# Altium PCB Group9Racer.PcbDoc (part 1 of 2)
Units mm, origin at the board's own origin, x right, y up, seen from the top; angles counter-clockwise.
Board outline 64 x 85 mm, 4 copper layers (Top Side, Ground Plane, Power Plane, Bottom Side), stack 0.844 mm thick; 107 components, 71 nets, 321 pads, 104 vias.
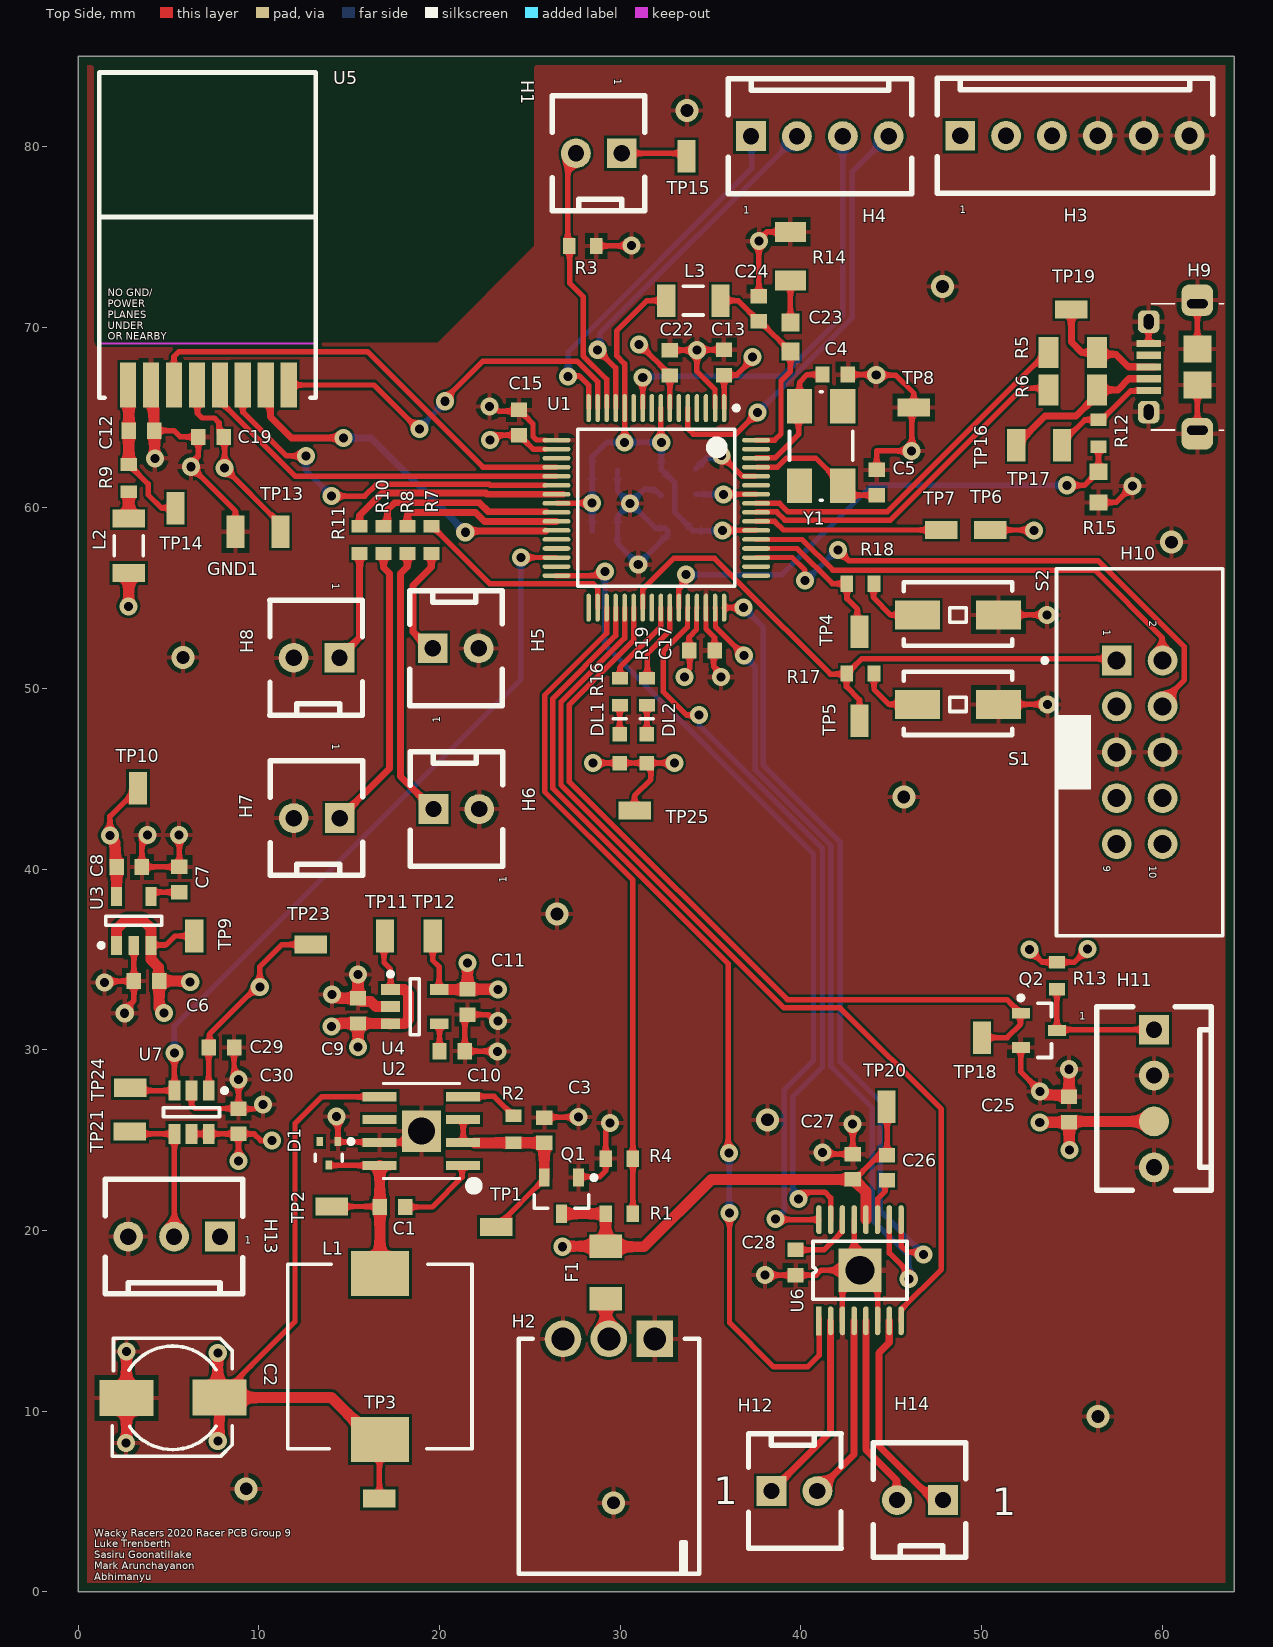
[diagram p0: Top Side view]
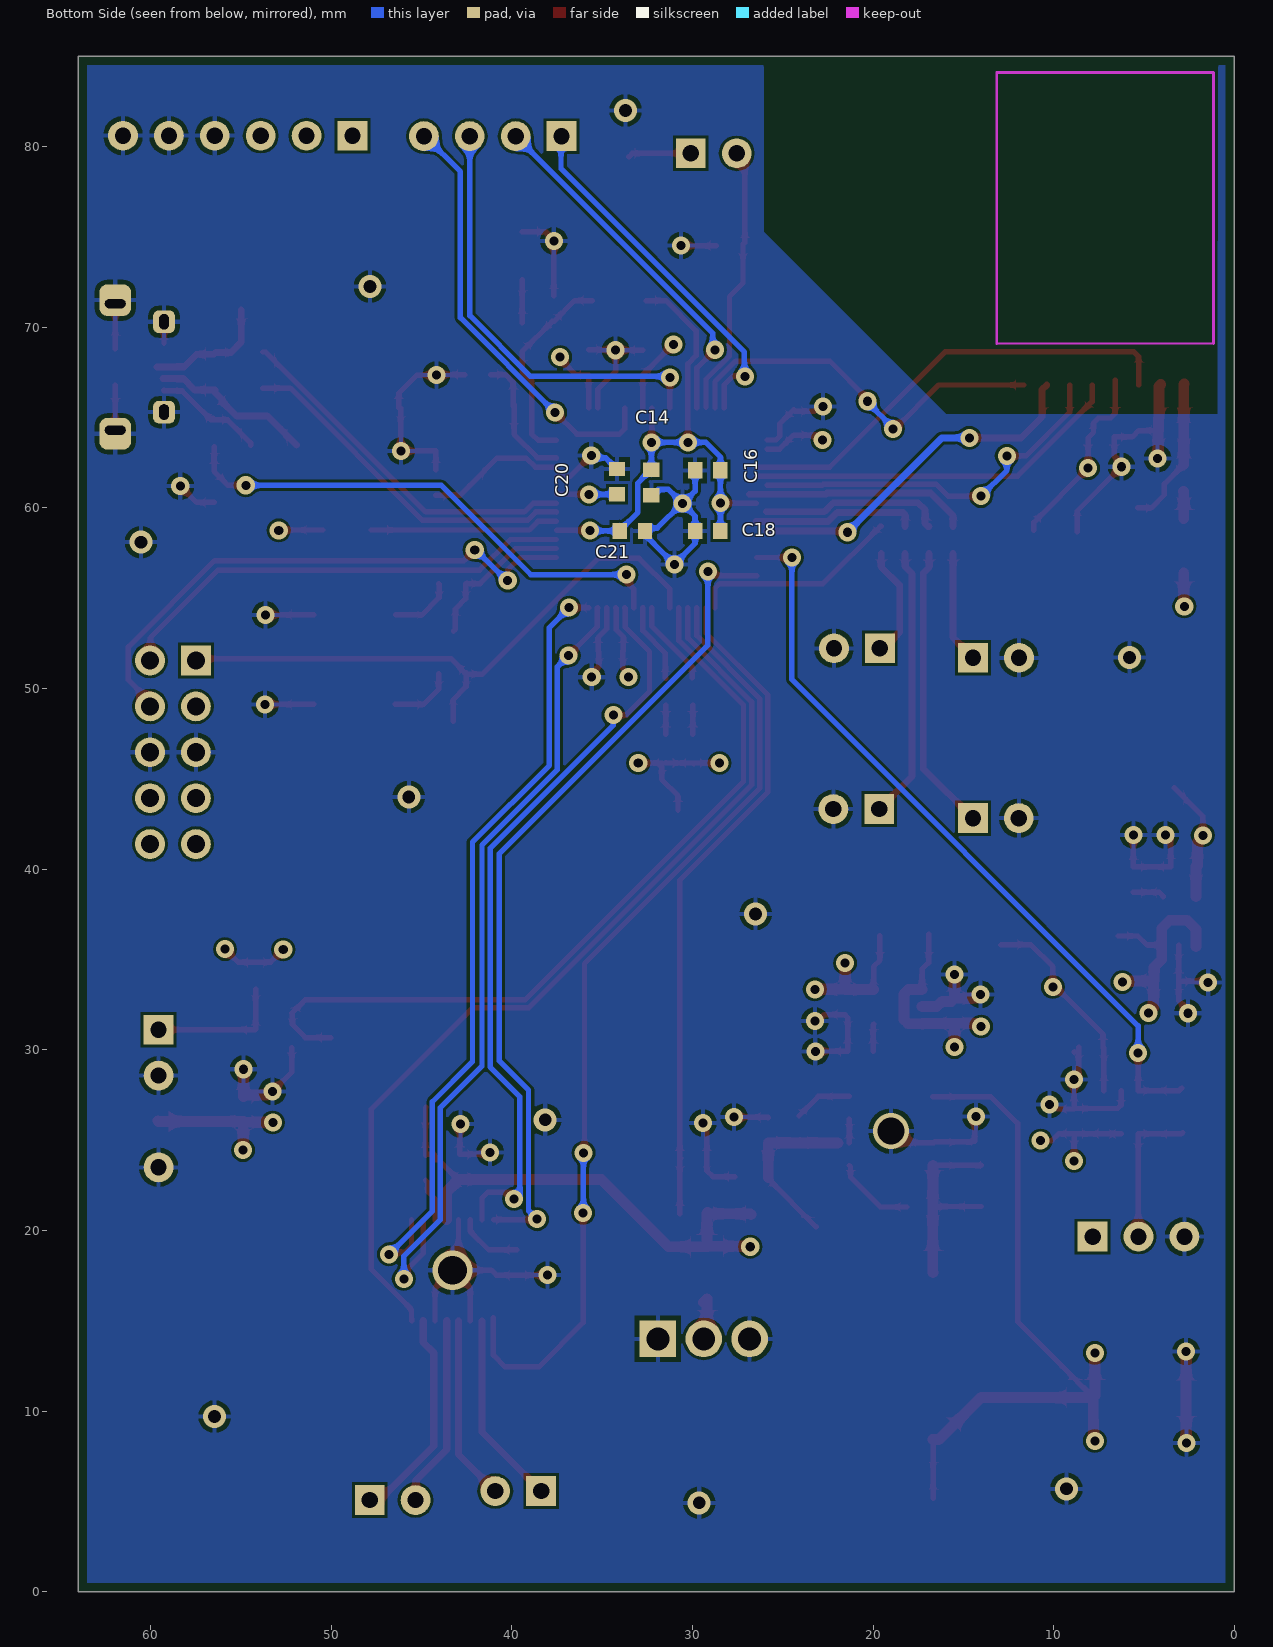
[diagram p1: Bottom Side view, seen from below]
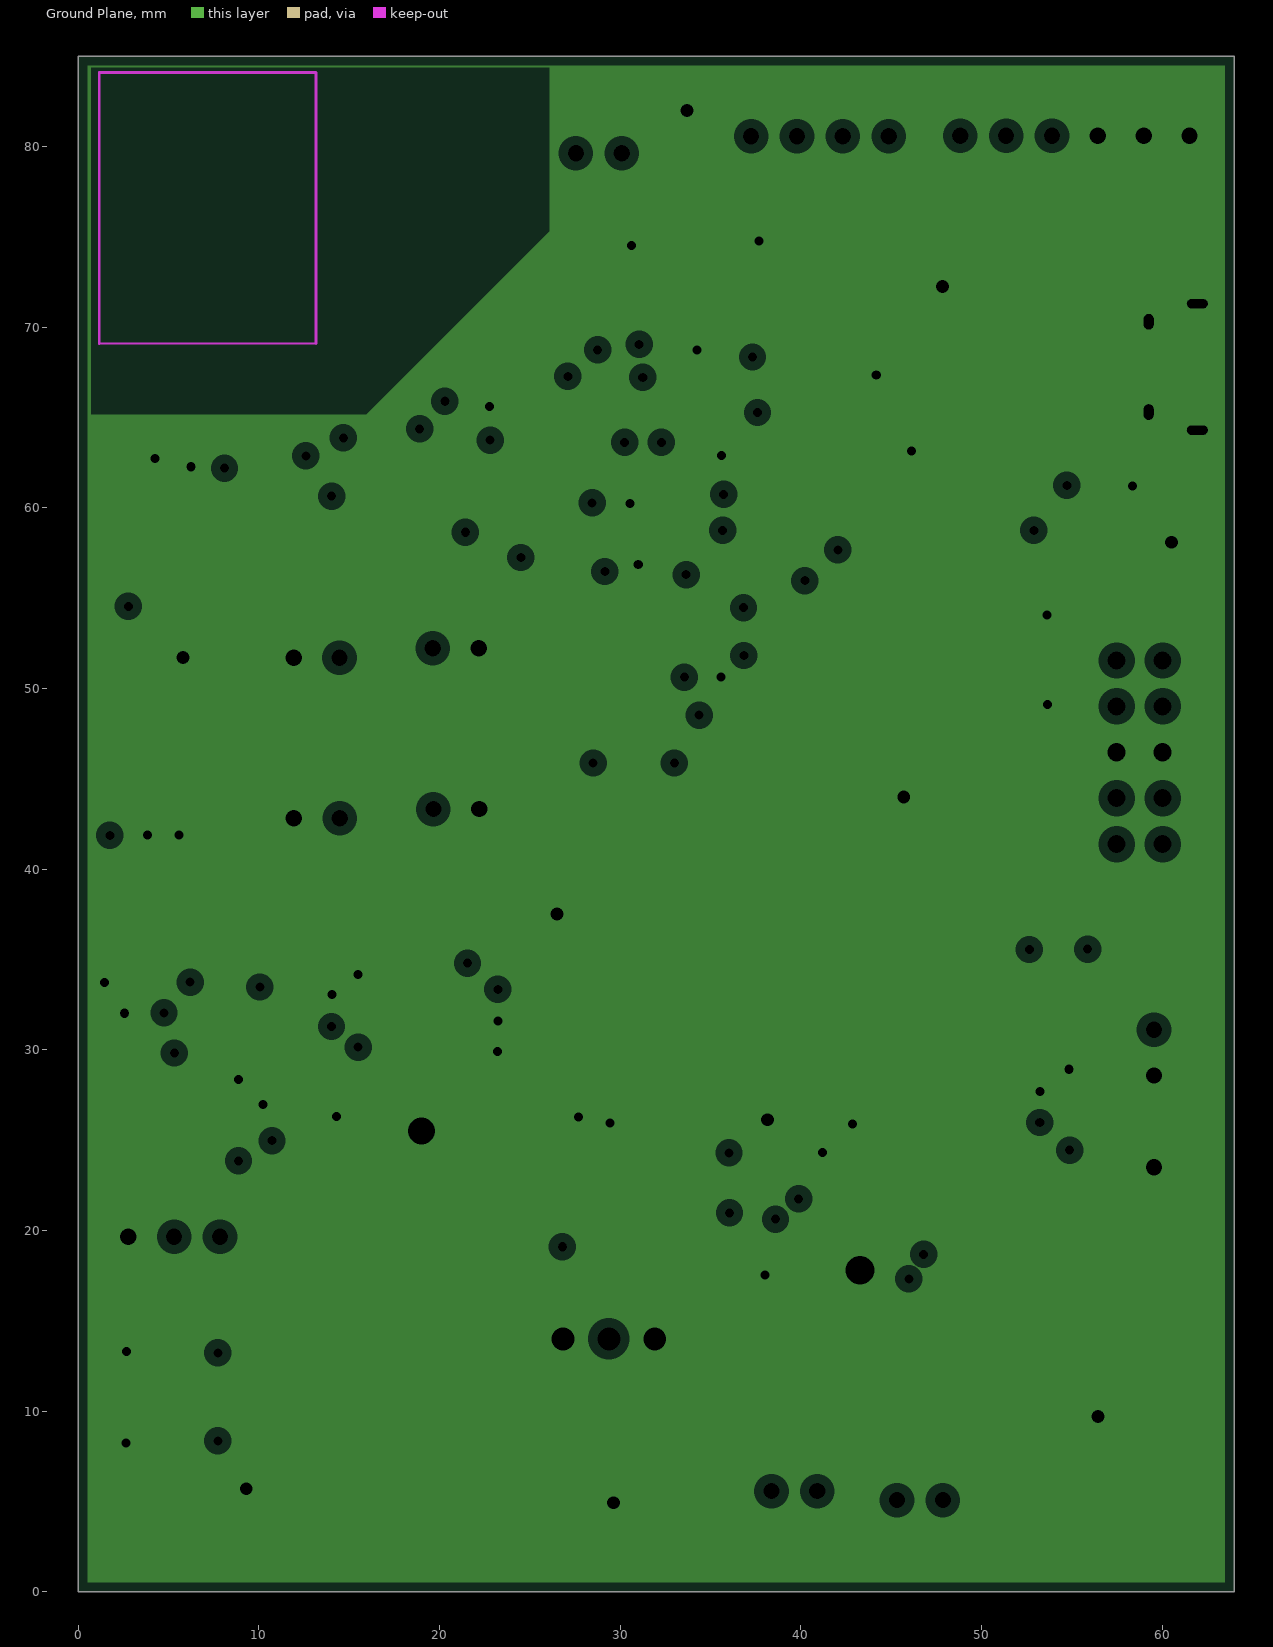
[diagram p2: Ground Plane, clearances drawn from the general rule]
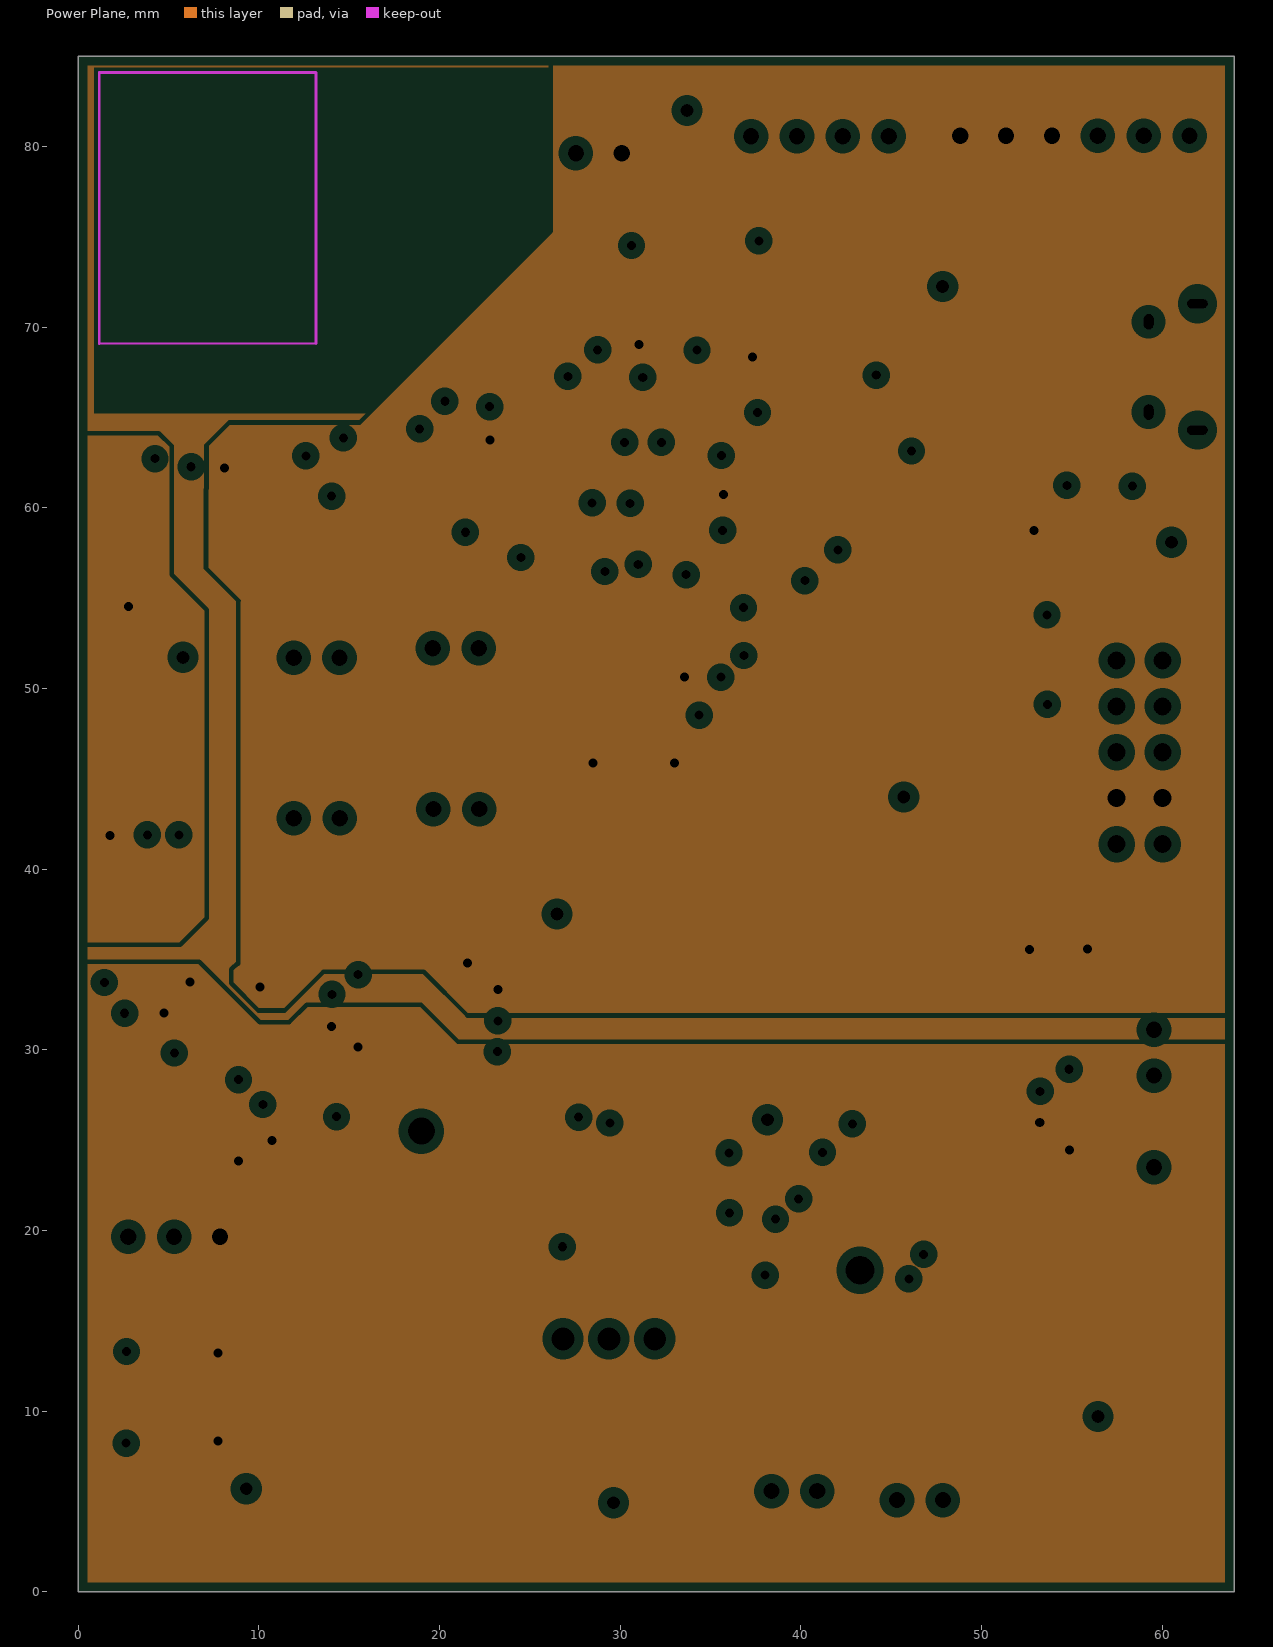
[diagram p3: Power Plane, clearances drawn from the general rule]

## Layer stack, top to bottom
Top Solder: solder mask 0.0102, Solder Resist, Dk 3.5
Top Side: signal copper 0.0356
Dielectric 1: core 0.32, FR-4, Dk 4.8
Ground Plane: plane copper 0.036, net GND
Dielectric 3: prepreg 0.127, Dk 4.2
Power Plane: plane copper 0.036, net (Multiple Nets)
Dielectric 4: core 0.254, Dk 4.2
Bottom Side: signal copper 0.0356
Bottom Solder: solder mask 0.0102, Solder Resist, Dk 3.5

## Board outline
0,85 64,85 64,0 0,0 0,85

## Design rules (kind name [scope] priority, off if disabled: settings)
BoardOutlineClearance [All] p1: gap=0.5 ignorepadtopadclearanceinfootprint=FALSE
Clearance Min_Clearance_Circuit_Labs [All] p1: gap=0.15 ignorepadtopadclearanceinfootprint=FALSE except(0: Arc-Hole Track-Hole SMDPad-Hole THPad-Hole Via-Hole Fill-Hole Poly-Hole Region-Hole Text-Hole)
DiffPairsRouting [All] p1: maxlimit=0.254 minlimit=0.254 mostfreqgap=0.254 toplayer_minwidth=0.381 toplayer_maxwidth=0.381 toplayer_prefwidth=0.381 bottomlayer_minwidth=0.381 bottomlayer_maxwidth=0.381 bottomlayer_prefwidth=0.381 maxuncoupledlength=12.7
FanoutControl Fanout_BGA [IsBGA] p1 off: bgadir=Out bgaviamode=Centered fanoutstyle=Auto fanoutdirection=Alternating viagrid=0.025 // Fanout_BGA (Default Rule)
HoleSize [All] p1: absolutevalues=TRUE maxlimit=10 minlimit=0.3 maxpercent=80.000 minpercent=20.000
MinimumAnnularRing [All] p1: minimumring=0.1
MinimumSolderMaskSliver [All] p1: minsoldermaskwidth=0.1
NetAntennae [All] p1: netantennaetolerance=1
PasteMaskExpansion [All] p1 off: expansion=0.2
PlaneClearance [All] p1: clearance=0.508
PlaneConnect [All] p1: planeconnectstyle=Relief reliefexpansion=0.508 reliefentries=4 reliefconductorwidth=0.254 reliefairgap=0.254
PolygonConnect [All] p1: connectstyle=Relief reliefconductorwidth=0.254 reliefentries=4 polygonreliefangle="90 Angle" airgapwidth=0.254
RoutingVias [All] p1: holewidth=0.5 width=1 viastyle="Through Hole" minholewidth=0.3 minwidth=0.6 maxholewidth=1 maxwidth=2
SMDNeckDown [All] p1 off: percent=50.000
SMDToCorner [All] p1: distance=98425
SMDToPlane [All] p1: distance=1968504
SilkToSolderMaskClearance SilkscreenOverComponentPads [IsPad] p1: minsilkscreentomaskgap=0.254 clearancetoexposedcopper=TRUE
SolderMaskExpansion [All] p1: expansion=0.102
ViasUnderSMD [All] p1: allowed=FALSE
Width [All] p1: maxlimit=2 minlimit=0.15 preferedwidth=0.3
21 further rules are at their usual default settings.

## Classes and differential pairs
differential pair D: +D_P -D_N

## Components (designator, comment, footprint, x,y, rotation, side; value= is the part's Value field where it differs from the comment)
C1 "100nF" CAPC1608L 17.4,21.3 r0 top
C2 "100uF/16V" NICH-1 5.232,10.744 r0 top
C3 "10uF" CAPC1608L 25.8,25.55 r270 top
C4 "27pF" CAPC1608L 41.9,67.375 r0 top
C5 "27pF" CAPC1608L 44.2,61.4 r90 top
C6 "1uF" CAPC1608L 3.785,33.807 r0 top
C7 "10nF" CAPC1608L 5.6,39.425 r270 top
C8 "1uF" CAPC1608L 2.825,40.125 r180 top
C9 "1uF" CAPC1608L 15.494,32.156 r270 top
C10 "10nF" CAPC1608L 20.7,29.925 r180 top
C11 "1uF" CAPC1608L 21.55,32.65 r90 top
C12 "10uF" CAPC1608L 3.5,64.275 r180 top
C13 "100nF" CAPC1608L 35.75,68.05 r90 top
C14 "100nF" CAPC1608L 32.275,61.4 r90 bottom
C15 "100nF" CAPC1608L 24.4,64.725 r90 top
C16 "100nF" CAPC1608L 29.15,62.075 r180 bottom
C17 "100nF" CAPC1608L 34.525,52.1 r0 top
C18 "100nF" CAPC1608L 29.15,58.725 r180 bottom
C19 "10nF" CAPC1608L 7.35,63.925 r0 top
C20 "100nF" CAPC1608L 34.175,61.45 r90 bottom
C21 "100nF" CAPC1608L 33.325,58.725 r0 bottom
C22 "100nF" CAPC1608L 32.75,68.025 r90 top
C23 "4.7uF" CAPC1608N 39.425,69.45 r270 top
C24 "100nF" CAPC1608L 37.675,71.025 r90 top
C25 "100nF" CAPC1608L 54.85,26.7 r270 top
C26 "10nF" CAPC1608L 44.775,23.475 r270 top
C27 "10uF" CAPC1608L 42.875,23.525 r270 top
C28 "2.2uF" CAPC1608L 39.7,18.225 r270 top
C29 "100nF" CAPC1608L 7.925,30.125 r0 top
C30 "100nF" CAPC1608L 8.875,26.05 r90 top
D1 "BAS16TT1G" SOT416 13.875,24.275 r180 top
DL1 "Yellow" WL-SMCW0603 29.975,47.475 r270 top
DL2 "Bright Green" WL-SMCW0603 31.475,47.475 r270 top
F1 "5A" RESC3216N 29.2,17.675 r90 top
GND1 "GND" TP_0603 8.7,58.675 r90 top
H1 "2 Pin Molex KK HDR" MOLEX_KK_2_HDR 30.09,79.625 r180 top
H2 "Battery_HEADER_3pin" BATT_HEADER_3POS 29.375,14 r180 top
H3 "6 Pin Molex KK Hdr" MOLEX_KK_6_HDR 48.82,80.6 r0 top
H4 "4 Pin Molex KK Hdr" MOLEX_KK_4_HDR#1 37.245,80.575 r0 top
H5 "2 Pin Molex KK HDR" MOLEX_KK_2_HDR 19.625,52.225 r0 top
H6 "2 Pin Molex KK HDR" MOLEX_KK_2_HDR 19.66,43.325 r0 top
H7 "2 Pin Molex KK HDR" MOLEX_KK_2_HDR 14.475,42.825 r180 top
H8 "2 Pin Molex KK HDR" MOLEX_KK_2_HDR 14.465,51.7 r180 top
H9 "JS_USB_MICRO_B" FCI_USB_10118194-0001LF 63.4,67.8 r90 top
H10 "Header 5X2 Vert" IDC2.54-V10D 58.755,46.47 r270 top
H11 "4 Pin Molex KK Hdr" MOLEX_KK_4_HDR#2 59.55,31.115 r270 top
H12 "2 Pin Molex KK HDR" MOLEX_KK_2_HDR 38.375,5.575 r0 top
H13 "3 Pin Molex KK Hdr" MOLEX_KK_3_HDR 7.849,19.66 r180 top
H14 "2 Pin Molex KK HDR" MOLEX_KK_2_HDR 47.865,5.075 r180 top
L1 "IND 5.2UH 6A" INDUCTOR5u2 16.7,13.025 r270 top
L2 "1A max, Idc 0.3R," INDC3216L 2.8,57.9 r270 top
L3 "1A max, Idc 0.3R," INDC3216L 34.05,71.475 r180 top
Q1 "SSM3J328R,LF" SOT23_L 26.75,21.925 r270 top
Q2 "SSM3J328R,LF" SOT23_L 53.175,31.075 r0 top
R1 "220K" RESC1608L 29.95,20.925 r180 top
R2 "100K" RESC1608L 24.1,25.6 r270 top
R3 "10K" RESC1608L 27.925,74.5 r180 top
R4 "220K" RESC1608L 29.95,23.975 r0 top
R5 "27R" RESC3216L 55.05,68.6 r180 top
R6 "27R" RESC3216L 55.05,66.525 r180 top
R7 "680R" RESC1608L 19.55,58.225 r270 top
R8 "680R" RESC1608L 18.225,58.225 r270 top
R9 "10R" RESC1608L 2.8,61.65 r270 top
R10 "680R" RESC1608L 16.9,58.225 r270 top
R11 "680R" RESC1608L 15.575,58.225 r270 top
R12 "27K" RESC1608L 56.475,64.125 r90 top
R13 "1K" RESC1608L 54.175,34.1 r90 top
R14 "1R" RESC3216L 39.425,73.925 r270 top
R15 "47K" RESC1608N 56.475,61.15 r90 top
R16 "680R" RESC1608L 29.985,49.822 r90 top
R17 "680R" RESC1608L 43.3,50.825 r0 top
R18 "680R" RESC1608L 43.3,55.8 r0 top
R19 "680R" RESC1608L 31.485,49.822 r90 top
S1 "EVQPNF05M" EVQPNF05M 48.7,49.125 r0 top
S2 "EVQPNF05M" EVQPNF05M 48.7,54.075 r0 top
TP1 "VBAT" TP_0603 23.15,20.2 r180 top
TP2 "5V" TP_0603 14.025,21.325 r180 top
TP3 "5V" TP_0603 16.675,5.175 r0 top
TP4 "TP_0603" TP_0603 43.25,53.15 r90 top
TP5 "nRST" TP_0603 43.25,48.225 r270 top
TP6 "3V3" TP_0603 50.475,58.775 r0 top
TP7 "Erase" TP_0603 47.775,58.775 r0 top
TP8 "GND" TP_0603 46.25,65.55 r0 top
TP9 "5V" TP_0603 6.425,36.3 r270 top
TP10 "3V3RF" TP_0603 3.3,44.475 r90 top
TP11 "5V" TP_0603 16.975,36.3 r90 top
TP12 "3V3" TP_0603 19.625,36.3 r270 top
TP13 "3V3" TP_0603 11.2,58.675 r90 top
TP14 "3V3RF" TP_0603 5.375,59.975 r270 top
TP15 "3V3" TP_0603 33.675,79.45 r90 top
TP16 "D_N" TP_0603 51.925,63.475 r90 top
TP17 "VBUS" TP_0603 54.45,63.475 r270 top
TP18 "SP_EN" TP_0603 50.025,30.675 r90 top
TP19 "D_P" TP_0603 54.975,70.975 r180 top
TP20 "VBAT" TP_0603 44.75,26.85 r270 top
TP21 "LEDB" TP_0603 2.845,25.476 r180 top
TP23 "3V3" TP_0603 12.875,35.825 r180 top
TP24 "LEDA" TP_0603 2.875,27.9 r180 top
TP25 "3V3" TP_0603 30.8,43.25 r0 top
U1 "ATSAM4S8BA-ANR" LQFP64_L 32,60 r270 top locked
U2 "ADP2302ARDZ-5.0 BUCK" RD_8_1 19,25.5 r180 top locked value=Value
U3 "CAT6219-330TDGT3" SOT95P280X145-5N 3.073,37.135 r90 top
U4 "CAT6219-330TDGT3" SOT95P280X145-5N 18.635,32.389 r0 top
U5 "nRF24 SMD" NRF24 1.157,66.1 r0 top
U6 "DRV8833" HTSOP16 41,15 r90 top locked
U7 "SN74LVC1T45" SOT23-6_N 6.274,26.543 r270 top
Y1 "12MHz" 6.0X3.5-4 41.125,63.425 r90 top

## Footprints (in the part's own frame and the unit in brackets; to place one, negate y for a bottom-side part, rotate by r counter-clockwise, add the part's x,y. Pads: shape width x height; smd on the part's side, far side on the other; paste and mask are expansions set on the pad)
6.0X3.5-4 [mm] "4 SMD 6.0X3.5 mm No Lead Crystal"
  rect 1.9x1.4 smd: 1(-2.2,-1.2) 2(2.2,-1.2) 3(2.2,1.2) 4(-2.2,1.2)
  silkscreen extent -3,-1.75 3,1.75, body extent -3,-1.75 3,1.75, height 1.2
BATT_HEADER_3POS [mil]
  rect 80x80 hole 50: 1(-100,0)
  round 80 hole 50: 2(0,0) 3(100,0)
  silkscreen extent -197,0 197,512
CAPC1608L [mm] "Chip Capacitor, Body 1.6x0.8mm, IPC High Density"
  rect 0.8x0.9 smd: 1(-0.7,0) 2(0.7,0)
  body extent -0.87,-0.48 0.87,0.48, height 0.85
CAPC1608N [mm] "Chip Capacitor, Body 1.6x0.8mm, IPC Medium Density"
  rect 1x1 smd: 1(-0.8,0) 2(0.8,0)
  body extent -0.87,-0.48 0.87,0.48, height 0.85
EVQPNF05M [mm] "Panansonic light touch SMD push button switch"
  rect 2.5x1.6 smd: 1(-2.25,0) 2(2.25,0)
  silkscreen extent -3,-1.7 3,1.8, body extent -3,-1.7 3,1.8, height 5
FCI_USB_10118194-0001LF [mm] "Micro USB B Type Receptacle"
  rect 0.4x1.35 smd mask+0.07: 1(-1.3,4.15) 2(-0.65,4.15) 3(0,4.15) 4(0.65,4.15) 5(1.3,4.15)
  rrect50% 1.75x1.75 hole 0.5 slot 1.15 at 90 deg copper offset -0.2,0 paste+0 mask+0.1: 6(-3.5,1.45)
  rrect50% 1.25x1.2 hole 0.55 slot 0.85 at 0 deg: 6(-2.5,4.15) 6(2.5,4.15)
  rect 1.5x1.55 smd: 6(-1,1.45) 6(1,1.45)
  rrect50% 1.75x1.75 hole 0.5 slot 1.15 at 90 deg copper offset 0.2,0 paste+0 mask+0.1: 6(3.5,1.45)
  silkscreen extent -3.5,0 3.5,4
HTSOP16 [mm]
  rect 1.6x0.3 smd: 1(0,0)
  oval 1.6x0.3 smd: 2(0,-0.65) 3(0,-1.3) 4(0,-1.95) 5(0,-2.6) 6(0,-3.25) 7(0,-3.9) 8(0,-4.55) 9(5.6,-4.55) 10(5.6,-3.9) 11(5.6,-3.25) 12(5.6,-2.6) 13(5.6,-1.95) 14(5.6,-1.3) 15(5.6,-0.65) 16(5.6,0)
  rect 2.4x2.4 smd paste-0.5: 17(2.8,-2.275)
  silkscreen extent 1.2,-4.88 4.4,0.33
IDC2.54-V10D [mm] "Connector; IDC, Low Profile Male Header, Thru-Hole; 10 Position; Vertical; Pitch 2.54 mm; Body 20.32 x 9.2 x 9.45 mm (LxWxH)"
  rect 1.65x1.65 hole 1: 1(-5.08,-1.27)
  round 1.65 hole 1: 2(-5.08,1.27) 3(-2.54,-1.27) 4(-2.54,1.27) 5(0,-1.27) 6(0,1.27) 7(2.54,-1.27) 8(2.54,1.27) 9(5.08,-1.27) 10(5.08,1.27)
  silkscreen extent -10.16,-5.37 10.16,4.6, body extent -10.16,-4.6 10.16,4.6, height 9.45
INDC3216L [mm] "Chip Inductor, Body 3.2x1.6mm, IPC High Density"
  rect 1x1.8 smd: 1(-1.5,0) 2(1.5,0)
  silkscreen extent -0.55,-0.8 0.55,0.8, body extent -1.75,-0.95 1.75,0.95, height 1.9
INDUCTOR5u2 [mm]
  rect 2.5x3.2 smd: 1(-4.6,0) 2(4.6,0)
  silkscreen extent -5.1,-5.1 5.1,5.1
LQFP64_L [mm] "Thin QFP, 64-Leads, Body 10x10mm, Pitch 0.5mm, IPC High Density"
  oval 1.55x0.25 smd mask+0.07: 1(-5.525,3.75) 2(-5.525,3.25) 3(-5.525,2.75) 4(-5.525,2.25) 5(-5.525,1.75) 6(-5.525,1.25) 7(-5.525,0.75) 8(-5.525,0.25) 9(-5.525,-0.25) 10(-5.525,-0.75) 11(-5.525,-1.25) 12(-5.525,-1.75) 13(-5.525,-2.25) 14(-5.525,-2.75) 15(-5.525,-3.25) 16(-5.525,-3.75) 33(5.525,-3.75) 34(5.525,-3.25) 35(5.525,-2.75) 36(5.525,-2.25) 37(5.525,-1.75) 38(5.525,-1.25) 39(5.525,-0.75) 40(5.525,-0.25) 41(5.525,0.25) 42(5.525,0.75) 43(5.525,1.25) 44(5.525,1.75) 45(5.525,2.25) 46(5.525,2.75) 47(5.525,3.25) 48(5.525,3.75)
  oval 0.25x1.55 smd mask+0.07: 17(-3.75,-5.525) 18(-3.25,-5.525) 19(-2.75,-5.525) 20(-2.25,-5.525) 21(-1.75,-5.525) 22(-1.25,-5.525) 23(-0.75,-5.525) 24(-0.25,-5.525) 25(0.25,-5.525) 26(0.75,-5.525) 27(1.25,-5.525) 28(1.75,-5.525) 29(2.25,-5.525) 30(2.75,-5.525) 31(3.25,-5.525) 32(3.75,-5.525) 49(3.75,5.525) 50(3.25,5.525) 51(2.75,5.525) 52(2.25,5.525) 53(1.75,5.525) 54(1.25,5.525) 55(0.75,5.525) 56(0.25,5.525) 57(-0.25,5.525) 58(-0.75,5.525) 59(-1.25,5.525) 60(-1.75,5.525) 61(-2.25,5.525) 62(-2.75,5.525) 63(-3.25,5.525) 64(-3.75,5.525)
  silkscreen extent -5.65,-4.35 4.35,4.55, body extent -5,-5 5,5, height 1.6
MOLEX_KK_2_HDR [mil] "MOLEX_KK_2_HDR"
  rect 65x65 hole 35.43: 1(0,0)
  round 65 hole 35.43: 2(100,0)
  silkscreen extent -50,-125 152,125, body extent -44,-121 146,119, height 630
MOLEX_KK_3_HDR [mil] "MOLEX_KK_3_HDR"
  rect 65x65 hole 35.43: 1(0,0)
  round 65 hole 35.43: 2(100,0) 3(200,0)
  silkscreen extent -50,-125 250,125, body extent -44,-120 244,119, height 630
MOLEX_KK_4_HDR#1 [mil] "MOLEX_KK_4_HDR"
  rect 65x65 hole 35.43: 1(0,0)
  round 65 hole 35.43: 2(100,0) 3(200,0) 4(300,0)
  silkscreen extent -50,-125 350,125, body extent -44,-119 343,119, height 630
MOLEX_KK_4_HDR#2 [mil] "MOLEX_KK_4_HDR"
  rect 65x65 hole 35.43: 1(0,0)
  round 65 hole 35.43: 2(100,0) 4(300,0)
  round 65 smd: 3(200,0)
  silkscreen extent -50,-125 350,125, body extent -44,-119 343,119, height 630
MOLEX_KK_6_HDR [mil] "MOLEX_KK_6_HDR"
  rect 65x65 hole 35.43: 1(0,0)
  round 65 hole 35.43: 2(100,0) 3(200,0) 4(300,0) 5(400,0) 6(500,0)
  silkscreen extent -50,-125 550,125, body extent -44,-119 543,119, height 630
NICH-1 [mm] "Electrolytic capacitor"
  rect 3x2 smd: 1(-2.561,-0.022) 2(2.584,0.011)
  silkscreen extent -3.34,-3.25 3.3,3.3, body extent -3.2,-3.2 3.2,3.2, height 5.3
NRF24 [mm]
  rect 0.9x2.5 smd: 1(1.6,0.7) 2(2.871,0.7) 3(4.143,0.7) 4(5.414,0.7) 5(6.686,0.7) 6(7.957,0.7) 7(9.229,0.7) 8(10.5,0.7)
  Keep-Out Layer lines w0.1: 0,3 12,3
  Keep-Out Layer lines w0.15: 0,3 0,18 12,18 12,3
  silkscreen extent 0,0 12,18
RD_8_1 [mil]
  rect 74x20 smd paste+0 mask+0: 1(-91,75) 2(-91,25) 3(-91,-25) 4(-91,-75) 5(91,-75) 6(91,-25) 7(91,25) 8(91,75)
  rect 84.65x90 smd paste-44.5 mask+0: EPAD(0,0)
  silkscreen extent -118,-104 83,123, body extent 0,0 10,10, height 10
RESC1608L [mm] "Chip Resistor, Body 1.6x0.8mm, IPC High Density"
  rect 0.7x0.9 smd: 1(-0.75,0) 2(0.75,0)
  body extent -0.85,-0.48 0.85,0.48, height 0.9
RESC1608N [mm] "Chip Resistor, Body 1.6x0.8mm, IPC Medium Density"
  rect 0.9x1 smd: 1(-0.85,0) 2(0.85,0)
  body extent -0.85,-0.48 0.85,0.48, height 0.6
RESC3216L [mm] "Chip Resistor, Body 3.1x1.6mm, IPC High Density"
  rect 1.1x1.7 smd: 1(-1.35,0) 2(1.35,0)
  body extent -1.68,-0.87 1.68,0.87, height 2.54
RESC3216N [mm] "Chip Resistor, Body 3.2x1.6mm, IPC Medium Density"
  rect 1.3x1.8 smd: 1(-1.45,0) 2(1.45,0)
  body extent -1.68,-0.87 1.68,0.87, height 0.71
SOT23-6_N [mm]
  rect 1.1x0.65 smd: 1(-1.2,0.95) 2(-1.2,0) 3(-1.2,-0.95) 4(1.2,-0.95) 5(1.2,0) 6(1.2,0.95)
  silkscreen extent -1.32,-1.55 0.25,1.95, body extent -0.9,-1.55 0.9,1.55, height 1.45
SOT23_L [mm] "SOT23, 3-Leads, Body 2.9x1.3mm, Pitch 0.95mm, Lead Span 2.3mm, IPC High Density"
  rect 1x0.6 smd: 1(-1,0.95) 2(-1,-0.95) 3(1,0)
  silkscreen extent -1.12,-1.5 0.7,1.93, body extent -0.7,-1.5 0.7,1.5, height 1.1
SOT95P280X145-5N [mm] "SOT23, 5-Leads, Body 2.90x2.80mm, Pitch 0.95mm, IPC Medium Density"
  rect 1.05x0.6 smd: 1(-1.35,0.95) 2(-1.35,0) 3(-1.35,-0.95) 4(1.35,-0.95) 5(1.35,0.95)
  silkscreen extent -1.47,-1.55 0.25,1.92, body extent -0.87,-1.52 0.87,1.53, height 1.45
SOT416 [mm] "SOT-416 Leads; Body 1.8 x 1.8 mm, inc. leads (LxW max)"
  rect 0.35x0.5 smd: 1(-0.5,-0.65) 2(0.5,-0.65) 3(0,0.65)
  silkscreen extent -1.35,-0.77 0.75,0.45
TP_0603 [mm] "TestPoint 0603"
  rect 1.8x1 smd: 1(0,0)
  body extent -1,-0.6 1,0.6, height 0.9
WL-SMCW0603 [mm] "2.4 x 0.8 x 0.7mm LED"
  rect 0.8x0.8 smd: 1(0,0) 2(1.6,0)
  silkscreen extent -0.85,-0.35 -0.85,0.35

## Part data
C1 C13 C14 C15 C16 C17 C18 C20 C21 C22 C24 C25 C29 C30: library part CC_100nF_0603, "CAP CER 100nF X7R +-10% 50V 0603", Code_IPC="1608 [0603]", PackageReference=0603, Storage Location="PCB Assembly WS", Supplier="ECE Dept"
C2: library part CA_100uF_16V, "CAP ALUM 100uF 16V SMD", Manufacturer=Nichcon, Manufacturer PN=UWX1C101MCL1GB, Supplier Part Number 1=1870677, Storage Location="PCB Assembly WS", Supplier="ECE Dept", Supplier 1=Farnell, Supplier 2=Digi-Key, Supplier Part Number 2=493-2105-1-ND
C3 C12 C27: library part CC_10uF_0603, "CAP CER 10UF X5R +-20% 6V3 0603", Voltage - Rated=6.3V, Storage Location="PCB Assembly WS", Supplier="ECE Dept"
C4 C5: library part CC_27pF_0603, "CAP CER 27pF NPO/COG +-5% 50V 0603", Code_IPC="1608 [0603]", PackageReference=0603, Storage Location="PCB Assembly WS", Supplier="ECE Dept"
C6 C8 C9 C11: library part CC_1uF_0603, "CAP CER 1uF Y5V -20% +80% 16V 0603", Max Voltage=16V, Code_IPC="1608 [0603]", PackageReference=0603, Storage Location="PCB Assembly WS", Supplier="ECE Dept"
C7 C10 C19 C26: library part CC_10nF_0603, "CAP CER 10nF X7R +-10% 50V 0603", Code_IPC="1608 [0603]", PackageReference=0603, Storage Location="PCB Assembly WS", Supplier="ECE Dept"
C23: library part CC_4.7uF_0603, "CAP CER 4.7uF X5R +-20%  10V 0603", Max Voltage=10V, Code_IPC=2012[0805], Note="Footprint corresponds to dimensions for bulk cassette packaging. This case size has tightened tolerances.", PackageReference=0805, Storage Location="PCB Assembly WS", Supplier="ECE Dept"
C28: library part CC_2.2uF_0603, "CAP CER 2.2uF X5R +-20% 10V 0603", Max Voltage=10V, Code_IPC="1608 [0603]", PackageReference=0603, Storage Location="PCB Assembly WS", Supplier="ECE Dept"
D1: library part DR_BAS16TT1G, "Diode Switching, Vr 75V, 200mA, SOT-416", Average Rectified Current=200mA, Case/Package=SOT-416-3, Forward Voltage=1.25V, Manufacturer="ON Semiconductor", Max Forward Surge Current (Ifsm)=500mA, Max Operating Temperature=150°C, Max Repetitive Reverse Voltage (Vrrm)=75V, Max Reverse Voltage (DC)=100V, Min Operating Temperature=-55°C, Package Quantity=1, Peak Reverse Current=1uA, Power Dissipation=225mW, Supplier Part Number 1=BAS16TT1GOSDKR-ND, ComponentLink1Description=https://datasheet.ciiva.com/8299/bas16tt1-d-8299729.pdf, ComponentLink1URL=https://datasheet.ciiva.com/8299/bas16tt1-d-8299729.pdf, ComponentLink2Description=https://datasheet.ciiva.com/4435/bas16tt1-d-103455-4435027.pdf, ComponentLink2URL=https://datasheet.ciiva.com/4435/bas16tt1-d-103455-4435027.pdf, ComponentLink3Description=https://datasheet.ciiva.com/28646/bas16tt1-d-28646580.pdf, ComponentLink3URL=https://datasheet.ciiva.com/28646/bas16tt1-d-28646580.pdf, ComponentLink4Description=https://datasheet.ciiva.com/16393/bas16tt1-d-16393622.pdf, ComponentLink4URL=https://datasheet.ciiva.com/16393/bas16tt1-d-16393622.pdf, ComponentLink5Description=https://datasheet.ciiva.com/923/bas16tt1-d-923016.pdf, ComponentLink5URL=https://datasheet.ciiva.com/923/bas16tt1-d-923016.pdf, ComponentLink6Description=https://datasheet.ciiva.com/923/bas16tt1-d-923017.pdf, ComponentLink6URL=https://datasheet.ciiva.com/923/bas16tt1-d-923017.pdf, ComponentLink7Description=https://datasheet.ciiva.com/923/bas16tt1-d-923018.pdf, ComponentLink7URL=https://datasheet.ciiva.com/923/bas16tt1-d-923018.pdf, ComponentLink8Description=https://datasheet.ciiva.com/25930/bas16tt1-d-25930986.pdf, ComponentLink8URL=https://datasheet.ciiva.com/25930/bas16tt1-d-25930986.pdf, Contact Plating=Tin,Matte, Current Rating=200mA, Element Configuration=Single, Forward Current=200mA, Halogen Free="Halogen Free", Height=0.9mm, Lead Free="Lead Free", Length=1.65mm, Manufacturer Part Number=BAS16TT1G, Manufacturer PN=BAS16TT1G, Max Surge Current=500mA, Number of Pins=3, Output Current=200mA, Packaging="Tape and Reel", Peak Non-Repetitive Surge Current=500mA, Polarity=Standard, Radiation Hardening=No, REACH SVHC="No SVHC", Recovery Time=6ns, Reverse Recovery Time=6ns, Storage Location="PCB Assembly WS", Supplier="ECE Dept", Supplier 1=Digi-Key, Supplier 2=Farnell, Supplier Part Number 2=2844752, Width=0.9mm
DL1: library part DL_150060YS75000, "LED Yellow 120mcd 0603 SMD", Forward Current If=30, Forward Voltage=2, Manufacturer="WURTH ELEKTRONIK", Manufacturer Part Number=150060YS75000, Supplier Part Number 1=2322074, LED Colour=Yellow, LED Mounting=SMD, Lens Shape=Rectangular, Luminous Intensity=120, Storage Location="PCB Assembly WS", Supplier="ECE Dept", Supplier 1=Farnell, Viewing Angle=140°, Wavelength Typ=590
DL2: library part DL_150060VS75000, "LED Bright Green 40mcd 0603 SMD", Forward Current If=30, Forward Voltage=2, Manufacturer="WURTH ELEKTRONIK", Manufacturer Part Number=150060VS75000, Supplier Part Number 1=2322073, LED Colour="Bright Green", LED Mounting=SMD, Luminous Intensity=40, Storage Location="PCB Assembly WS", Supplier="ECE Dept", Supplier 1=Farnell, Viewing Angle=140°, Wavelength Typ=570
F1: library part FS_Fuse_5.0A, "Fuse 5.0A Fast Acting 1206 SMD", Case/Package=1206, Case Code (Metric)=3216, DC Cold Resistance=19mR, Manufacturer="Bel TRP", Manufacturer Part Number=C1F5, Max Operating Temperature=125°C, Min Operating Temperature=-55°C, Supplier Part Number 1=507-1886-1-ND, Voltage Rating=125V, Voltage Rating (DC)=63V, Approvals=CE,cURus, Case Code (Imperial)=1206, ComponentLink1Description=http://www.farnell.com/datasheets/2571625.pdf, ComponentLink1URL=http://www.farnell.com/datasheets/2571625.pdf, ComponentLink2Description=http://belfuse.com/pdfs/C1F.pdf, ComponentLink2URL=http://belfuse.com/pdfs/C1F.pdf, ComponentLink3Description=http://www.mouser.com/ds/2/643/C1F-594910.pdf, ComponentLink3URL=http://www.mouser.com/ds/2/643/C1F-594910.pdf, ComponentLink4Description=https://belfuse.com/resources/StewartConnector/C1F.pdf, ComponentLink4URL=https://belfuse.com/resources/StewartConnector/C1F.pdf, Contact Plating=Nickel,Tin, Current Rating=5A, Fuse Type="Board Mount (Cartridge Style Excluded)", Length=0.126inch, Mount="Surface Mount", Number of Pins=2, Packaging="Tape and Reel", Pricing 1="1=0.32, 5=0.312, 10=0.298, 50=0.2662, 100=0.2479, 250=0.22032, 500=0.1836, 1000=0.17442 (USD)", Stock 1=725, Supplier 1=Digi-Key, Supplier 2=Element14, Supplier Part Number 2=2848595, Voltage Rating (AC)=125V, Width=0.062inch
GND1 TP1 TP2 TP3 TP5 TP6 TP7 TP8 TP9 TP10 TP11 TP12 TP13 TP14 TP15 TP16 TP17 TP18 TP19 TP20 TP21 TP23 TP24 TP25: library part TP_0603, "Test Point 1.65X0.9X1.2mm SMD", Manufacturer="TE Connectivity AMP Connectors", Manufacturer Part Number=1625854-3, Supplier Part Number 1=A106145CT-ND, Mounting Type="Surface Mount", Supplier 1=Digi-Key, Terminal="0.063\" x 0.031\" x 0.045\" (1.60mm x 0.80mm x 1.15mm)", Type="PC Test Point"
H1 H5 H6 H7 H8 H12 H14: library part JA_MOLEX_KK_2POS, "CONN HEADER 2POS 2.54mm VERT_Thru Hole", Supplier Part Number 1=1462926, Storage Location="ECE Dept Store", Supplier="ECE Dept", Supplier 1=Farnell
H2: "3Pin Header 2.54mm spacing"
H3: library part JA_MOLEX_KK_6POS, "CONN HEADER 6POS 2.54mm VERT_Thru Hole", Supplier Part Number 1=1462922, Storage Location="ECE Dept Store", Supplier="ECE Dept", Supplier 1=Farnell
H4 H11: library part JA_MOLEX_KK_4POS, "CONN HEADER 4POS 2.54mm VERT_Thru Hole", Manufacturer=Molex, Manufacturer PN=22-23-2041, Supplier Part Number 1=9731164, Storage Location="ECE Dept Store", Supplier="ECE Dept", Supplier 1=Farnell
H9: library part JS_USB_MICRO_B_SMT, "CONN USB MICRO B RECPT SMT R/A", Manufacturer=FCI, Manufacturer Part Number=10118194-0001LF, Supplier Part Number 1=609-4618-1-ND, Features="Shielded, Solder Retention", Gender=Receptacle, Mounting Type="Surface Mount, Right Angle, Horizontal", Number of Contacts=5, Specifications="USB 2.0", Supplier 1=Digi-Key
H10: library part JA_HDR_IDC_5X2_VERT, "IDC Header, 2,54mm, 10-Pin, Vert", Supplier Part Number 1=1096985, Storage Location="ECE Dept Store", Supplier="ECE Dept", Supplier 1=Farnell
H13: library part JA_MOLEX_KK_3POS, "CONN HEADER 3POS 2.54mm VERT_Thru Hole", Manufacturer=Molex, Manufacturer PN=22-23-2031, Supplier Part Number 1=9731156, Storage Location="ECE Dept Store", Supplier="ECE Dept", Supplier 1=Farnell
L1: library part CDRH104RNP-5R2NC, "FIXED IND 5.2UH 6A 22 MOHM SMD", Current - Saturation=5.6A, DC Resistance (DCR)="22 mOhm Max", Frequency - Self Resonant=-, Manufacturer="Sumida America Components Inc.", Operating Temperature="-40°C ~ 100°C", Package / Case=Nonstandard, Supplier Part Number 1=308-2280-1-ND, Tolerance=±30%, Category="Inductors, Coils, Chokes", ComponentLink1Description=http://products.sumida.com/products/pdf/CDRH104R.pdf, ComponentLink1URL=http://products.sumida.com/products/pdf/CDRH104R.pdf, Height - Seated (Max)="0.157\" (4.00mm)", Manufacturer Part Number=CDRH104RNP-5R2NC, Material - Core=Ferrite, Mounting Type="Surface Mount", Packaging="Cut Tape (CT)", Part Status=Active, Pricing 1="1=2.9, 10=2.678, 100=1.8743, 500=1.5173 (NZD)", Q @ Freq=-, Ratings=-, RoHS="RoHS Compliant", Shielding=Shielded, Size / Dimension="0.402\" L x 0.394\" W (10.20mm x 10.00mm)", Stock 1=3849, Supplier 1=Digi-Key, Supplier Device Package=-, Type=-
L2 L3: library part IN_Ferrite-Bead, "Ferrite Bead, Rdc 0.3R, Z100MHZ 600R, Imax 1A, SMD 1206", DC Current Rating=1, DC Resistance Max=0.08, Ferrite Case Style="1206 ^3216 Metric]", Frequency Range="50MHz to 1", Impedance Tolerance="± 25%", Manufacturer=FAIR-RITE, Manufacturer Part Number=2512066017Y1, Supplier Part Number 1=1612060, Ferrite Mounting=SMD, Impedance=600, Manufacturer PN=2512066017Y1, Storage Location="PCB Assembly WS", Supplier="ECE Dept", Supplier 1=Farnell
Q1 Q2: library part TM_SSM3J328R, "MOSFET P-CH 20V 6A SOT23-3", Case/Package=SOT-23-3, Continuous Drain Current (ID)=6A, Drain to Source Breakdown Voltage=-20V, Drain to Source Resistance=47.4mR, Drain to Source Voltage (Vdss)=20V, Gate to Source Voltage (Vgs)=8V, Input Capacitance=840pF, Input Capacitance (Ciss) @ Vds="840pF @ 10V", Manufacturer=Toshiba, Max Operating Temperature=150°C, Max Power Dissipation=1W, Min Operating Temperature=-55°C, Package / Case="SOT-23-3 Flat Leads", Package Quantity=3000, Power Dissipation=2W, Supplier Device Package=SOT-23F, Supplier Part Number=SSM3J328RLFDKR-ND, ComponentLink1Description=https://datasheet.ciiva.com/11158/ssm3j328r-datasheet-en-20140301-11158652.pdf, ComponentLink1URL=https://datasheet.ciiva.com/11158/ssm3j328r-datasheet-en-20140301-11158652.pdf, Current - Continuous Drain (Id) @ 25° C=6A, Element Configuration=Single, FET Feature="Logic Level Gate, 1.5V Drive", FET Type="MOSFET P-Channel, Metal Oxide", Gate Charge (Qg) @ Vgs="12.8nC @ 4.5V", Manufacturer Part Number=SSM3J328R,LF, Mount="Surface Mount", Number of Channels=1, Number of Elements=1, Number of Pins=3, Packaging="Tape and Reel", Power - Max=1W, Pricing="1=0.79, 10=0.658, 25=0.5772, 100=0.4939, 250=0.42836, 500=0.36284, 1000=0.27972 (NZD)", Radiation Hardening=No, Rds On Max=29.8mR, Storage Location="PCB Assembly WS", Supplier=Digi-Key, Supplier 1=Digi-Key, Supplier Part Number 1=SSM3J328RLFDKR-ND, Turn-Off Delay Time=107ns, Turn-On Delay Time=32ns, Vgs(th) (Max) @ Id="1V @ 1mA"
R1 R4: library part RS_220K, "RES 3.3K OHM 1/10W 5% 0603 SMD", Storage Location="PCB Assembly WS", Supplier="ECE Dept"
R2: library part RS_100K, "RES 100K OHM 1/10W 5% 0603 SMD", Storage Location="PCB Assembly WS", Supplier="ECE Dept"
R3: library part RS_10K, "RES 10.0K OHM 1/10W 5% 0603 SMD", Storage Location="PCB Assembly WS", Supplier="ECE Dept"
R5 R6: library part RT_27R, "RES 27R OHM 1/4W 5% 1206 SMD", Storage Location="PCB Assembly WS", Supplier="ECE Dept"
R7 R8 R10 R11 R16 R17 R18 R19: library part RS_680R, "RES 680 OHM 1/10W 5% 0603 SMD", Storage Location="PCB Assembly WS", Supplier="ECE Dept"
R9: library part RS_10R, "RES 10 OHM 1/10W 5% 0603 SMD", Storage Location="PCB Assembly WS", Supplier="ECE Dept"
R12: library part RS_27K, "RES 27K OHM 1/10W 5% 0603 SMD", Storage Location="PCB Assembly WS", Supplier="ECE Dept"
R13: library part RS_1K, "RES 1.0K OHM 1/10W 5% 0603 SMD", Storage Location="PCB Assembly WS", Supplier="ECE Dept"
R14: library part RT_1R, "RES 1R OHM 1/4W 5% 1206 SMD", Storage Location="PCB Assembly WS", Supplier="ECE Dept"
R15: library part RS_47K, "RES 47.0K OHM 1/10W 5% 0603 SMD", Storage Location="PCB Assembly WS", Supplier="ECE Dept"
S1 S2: library part WS_EVQPNF05M, "Panasonic 6 x 3.5mm SMD Light Touch Switch Type SMD", Manufacturer=Panasonic, Supplier Part Number 1=2079481, Manufacturer PN=EVQPNF05M, PackageDescription="6.0 x 3.5 mm", Storage Location="PCB Assembly WS", Supplier="ECE Dept", Supplier 1=Farnell, Supplier 2=Digi-Key, Supplier Part Number 2=P13598SCT-ND
TP4: "Test Point 1.65X0.9X1.2mm SMD", Manufacturer="TE Connectivity AMP Connectors", Manufacturer Part Number=1625854-3, Supplier Part Number 1=A106145CT-ND, Mounting Type="Surface Mount", Supplier 1=Digi-Key, Terminal="0.063\" x 0.031\" x 0.045\" (1.60mm x 0.80mm x 1.15mm)", Type="PC Test Point"
U1: library part SE_ATSAM4S16BA-MU, "IC MCU 32BIT 512KB FLASH 64LQFP", Manufacturer=Atmel, Package / Case=64-LQFP, Supplier Part Number 1=ATSAM4S8BA-ANRCT-ND, Voltage - Supply (Vcc/Vdd)="1.62 V ~ 3.6 V", Code_JEDEC=MO-220VMMD-3, ComponentLink1Description="Manufacturer URL", ComponentLink1URL=http://www.atmel.com/, ComponentLink2Description="SAM4S Series Datasheet", ComponentLink2URL=http://www.atmel.com/dyn/resources/prod_documents/11100.pdf, ComponentLink3Description="SAM4S Series Summary", ComponentLink3URL=http://www.atmel.com/dyn/resources/prod_documents/11100S.pdf, Connectivity="I²C, IrDA, Memory Card, SPI, SSC, UART/USART, USB", Core Processor="ARM® Cortex®-M4", Core Size=32-Bit, Data Converters="A/D 11x12b, D/A 2x12b", Manufacturer Part Number=ATSAM4S8BA-ANR, Number of I/O=47, PackageDescription="64-Pin Quad Flat No-Lead (QFN) Sawn, 9 x 9 x 1.0 mm Body, 0.5 mm Pitch, Exposed Pad", PackageReference=64PS, PackageVersion="revJ, Jul-2007", Packaging="Cut Tape (CT)", Peripherals="Brown-out Detect/Reset, DMA, POR, PWM, WDT", Program Memory Size="512KB (512K x 8)", Program Memory Type=FLASH, RAM Size="128K x 8", Speed=120MHz, Supplier 1=Digi-Key
U2: library part ADP2302ARDZ-5.0-R7, "IC REG BUCK 5V 2A 8SOIC", Current - Output=2A, Frequency - Switching=700kHz, Supplier Part Number 1=ADP2302ARDZ-5.0-R7CT-ND, Voltage - Input (Max)=20V, Voltage - Output (Min/Fixed)=5V, Manufacturer_Part_Number=ADP2302ARDZ-5.0-R7, Output Type=Fixed, Supplier 1=Digi-Key, Type=DEV, Vendor="Analog Devices Inc"
U3 U4: library part SV_CAT6219-330TDGT3, "IC REG LIN 3.3V 500MA TSOT23-5", Base Part Number=CAT6219, Current - Output=500mA, Package / Case="SOT-23-5 Thin, TSOT-23-5", Supplier Device Package=TSOT-23-5, Supplier Part Number=CAT6219-330TDGT3CT-ND, Voltage - Input (Max)=5.5V, Voltage - Output (Min/Fixed)=3.3V, Voltage Dropout (Max)="0.5V @ 500mA", ComponentLink1Description=http://www.onsemi.com/pub/Collateral/CAT6219-D.PDF, ComponentLink1URL=http://www.onsemi.com/pub/Collateral/CAT6219-D.PDF, Manufacturer Part Number=CAT6219-330TDGT3, Supplier=Digi-Key, Supplier 1=Digi-Key
U5: library part NRF24, "nRF24 SMD Module", Warning="No power planes near or under device"
U6: "Dual H-Bridge Motor Driver 1.5A"
U7: "1.8V - 5V level converter"
Y1: library part XT_CRYSTAL_12MHz_18pF, "CRYSTAL 12MHZ 18PF 6X3.5mm SMD", ESR (Equivalent Series Resistance)="60 Ohm", Frequency Stability=±50ppm, Frequency Tolerance=±30ppm, Load Capacitance=18pF, Manufacturer="CTS-Frequency Controls", Manufacturer Part Number=406C35D12M00000, Operating Mode=Fundamental, Operating Temperature="-20°C ~ 70°C", Package / Case="4-SMD, No Lead (DFN, LCC)", Supplier Part Number 1=CTX855CT-ND, Frequency=12MHz, Height="0.047\" (1.20mm)", Mounting Type="Surface Mount", Size / Dimension="0.236\" L x 0.138\" W (6.00mm x 3.50mm)", Supplier 1=Digi-Key

## Via types
v1: diameter 1, hole 0.5, Top Side to Bottom Side, 92 vias
v2: diameter 1.27, hole 0.711, Top Side to Bottom Side, 10 vias
v3: diameter 2, hole 1.5, Top Side to Bottom Side, 1 vias
v4: diameter 2.2, hole 1.6, Top Side to Bottom Side, 1 vias

## Nets (pads, with @x,y where several pads share a name; then routed paths per layer and width w, separated by ;. In a path a pad name is that pad's centre, name@x,y a point inside that pad or via, vN(x,y) a via of type N, cw(c..) or ccw(c..) an arc to the next point about the centre after c; other vN are vias at no path point)
3V3: C11.2 C13.1 C15.1 C17.1 C19.2 C20.1 C22.1 C29.1 DL1.2 DL2.2 H1.1 H3.1 H3.2 H3.3 H10.7 H10.8 R13.2 TP6.1 TP12.1 TP13.1 TP15.1 TP23.1 TP25.1 U1.1 U1.7 U1.18 U1.45 U1.58 U4.5 U5.4 U7.1 | length 66.2
  Top Side w0.3: U5.4@6.6,67.075 6.6,65.225 6.85,64.975 7.531,64.975 7.8,64.706 7.8,64.175 C19.2 8.1,63.875 v1(8.1,62.2) 11.1,59.2 TP13.1@11.1,58.75 ; U7.1 C29.1 C29.1 ; C29.1@7.275,30.075 7.275,30.875 9.875,33.475 v1(10.05,33.475) 10.05,34.6 11.275,35.825 TP23.1 12.9,35.825 TP23.1@12.925,35.8 ; TP12.1@19.625,36.325 TP12.1 19.625,34.95 19.975,34.6 U4.5@19.975,33.325 ; v1(22.8,63.75) 23.075,64.025 C15.1 25.175,63.25 U1.18@25.85,63.25 ; v1(28.5,45.875) DL1.2 ; DL1.2@29.925,45.825 DL1.2 ; H1.1 33.325,79.625 TP15.1@33.525,79.425 ; TP25.1 30.8,44.075 31.7,44.975 31.7,45.875 v1(33,45.875) ; v1(31.05,69.05) 31.075,69.05 32.75,67.375 C22.1 ; DL2.2@31.475,45.9 31.45,45.875 DL1.2 ; U1.7 C22.1@32.75,67.3 ; v1(33.55,50.625) 33.55,50.814 33.85,51.114 33.85,52.075 C17.1 33.819,52.106 33.819,52.856 ; 33.825,52.863 34.225,53.263 34.225,54.45 U1.45 ; v1(35.725,60.75) U1.58 ; U1.1 C13.1 36.45,67.35 37.325,68.225 v1(37.325,68.35) ; TP6.1 52.875,58.775 v1(52.9,58.75) ; v1(52.65,35.55) 53.35,34.85 R13.2 55.15,34.85 v1(55.875,35.575)
  Top Side w0.6: U4.5 21.564,33.339 C11.2@21.575,33.35 ; v1(21.55,34.8) C11.2 C11.2@21.575,33.35 ; v1(23.225,33.35) C11.2@21.575,33.35
  Bottom Side w0.3: C20.1 v1(35.725,60.75)
3V3RF: C8.2 L2.2 TP10.1 U3.5 | length 8.7
  Top Side w0.3: v1(1.75,41.875) 1.75,42.925 TP10.1@3.325,44.5
  Top Side w0.6: v1(1.75,41.875) 1.75,41.767 2.042,41.475 2.042,40.208 C8.2@2.123,40.127 ; U3.5 C8.2@2.123,40.127 ; C8.2@2.123,40.148 C8.2@2.123,40.127 ; C8.2 C8.2@2.123,40.127 ; v1(2.775,54.55) 2.8,54.575 L2.2
5V: C2.2 C6.2 C9.2 C25.2 C30.1 H11.3 H13.1 L1.2 TP3.1 TP9.1 TP11.1 U2.5 U3.1 U3.3 U4.1 U4.3 U7.5 U7.6 | length 78.5
  Top Side w0.3: U3.3@3.975,35.8 4.025,35.8 4.85,35.8 5.35,36.3 TP9.1 ; U7.5 7.218,25.343 U7.6@7.225,25.35 ; U7.6@7.2,25.35 U7.6@7.225,25.35 ; C2.2 7.818,10.757 9.55,12.489 9.55,12.5 12,14.95 12,25.925 13.475,27.4 U2.5@16.7,27.4 ; v1(8.875,23.85) C30.1 ; v1(10.725,24.975) 10.111,24.975 9.736,25.35 C30.1 ; TP3.1 16.675,8.4 L1.2 ; TP11.1@16.925,36.4 16.925,34.825 17.285,34.465 U4.1 ; U7.6@7.225,25.35 C30.1
  Top Side w0.6: U3.1@2.125,35.725 2.125,36.675 2.625,37.175 3.575,37.175 4.025,36.725 4.025,35.8 U3.3 U3.3 4.023,34.991 4.445,34.569 4.445,33.847 C6.2 ; v1(4.75,32.05) 4.475,32.325 4.475,33.798 C6.2 ; v1(6.2,33.75) 6.143,33.807 C6.2 ; v1(7.725,8.35) 7.802,8.427 7.802,9.491 7.816,9.505 C2.2 ; v1(7.725,13.225) 7.725,10.85 7.818,10.757 7.825,10.75 14.025,10.75 16.35,8.425 L1.2 ; v1(14.021,31.293) 14.199,31.471 15.48,31.471 C9.2 ; v1(15.494,30.15) C9.2 ; U4.1 18.045,33.339 18.288,33.096 18.288,31.674 18.059,31.445 17.291,31.445 U4.3 17.277,31.431 17.251,31.456 C9.2 ; v1(53.225,25.975) 53.237,25.987 54.837,25.987 C25.2 54.862,25.987 54.862,24.463 v1(54.875,24.45) ; C25.2@54.825,26.025 54.835,26.035 H11.3@59.535,26.035 ; H11.3@59.525,26.025 H11.3@59.535,26.035 ; H11.3 H11.3@59.535,26.035 ; H11.3@59.575,26.075 H11.3@59.535,26.035
BMV: R1.1 R4.2 U1.35 | length 37
  Top Side w0.3: U1.35 29.25,53.059 25.825,49.634 25.825,44.275 30.7,39.4 R4.2 ; R4.2@30.65,24 30.7,23.95 R1.1
Bump: H1.2 R3.2 U1.14 | length 15.1
  Top Side w0.3: R3.2@27.15,74.625 27.1,74.675 27.1,79.025 27.55,79.475 H1.2 ; R3.2@27.2,74.625 27.2,72.444 27.95,71.694 27.95,68.419 29.25,67.119 U1.14@29.25,65.575
BUTTON0: R18.1 TP4.1 U1.52 | length 8.7
  Top Side w0.3: U1.52 39.8,57.75 41.75,55.8 42.45,55.8 R18.1@42.475,55.825 ; R18.1 42.55,54.975 43.125,54.4 43.125,53.275 TP4.1@43.225,53.175
Channel0: R7.1 U1.34 | length 11.7
  Top Side w0.3: R7.1 19.6,58.975 22.775,55.8 28.5,55.8 28.75,55.55 U1.34
Channel1: R8.1 U1.26 | length 9.2
  Top Side w0.381: R8.1 18.225,59.627 18.348,59.75 21.987,59.75 22.487,59.25 U1.26
Channel2: R10.1 U1.25 | length 10.2
  Top Side w0.381: R10.1 16.962,58.975 17.122,59.135 17.122,59.897 17.506,60.281 22.207,60.281 22.703,59.785 25.887,59.785 U1.25@25.89,59.781
Channel3: R11.1 U1.23 | length 12.4
  Top Side w0.381: R11.1 15.575,59.575 16.812,60.812 22.563,60.812 22.625,60.75 U1.23@26.85,60.75
D_N: H9.2 R6.1 TP16.1 | length 9
  Top Side w0.381: TP16.1 53.526,65.076 55.226,65.076 56.041,65.891 56.041,66 56.425,66.385 56.425,66.525 57.55,66.525 58.175,67.15 H9.2@59.3,67.15
D_P: H9.3 R5.1 TP19.1 | length 7
  Top Side w0.381: TP19.1@54.975,70.95 54.975,69.175 55.55,68.6 R5.1 56.5,68.5 57.45,68.5 58.15,67.8 H9.3@59.639,67.8
GND: C2.1 C3.1 C4.2 C5.2 C6.1 C7.1 C8.1 C9.1 C10.1 C11.1 C12.1 C13.2 C14.1 C15.2 C16.1 C17.2 C18.1 C19.1 C20.2 C21.1 C22.2 C24.2 C25.1 C27.1 C28.2 C29.2 C30.2 D1.1 GND1.1 H2.1 H2.3 H3.4 H3.5 H3.6 H5.2 H6.2 H7.2 H8.2 H9.5 H9.6 H10.5 H10.6 H11.2 H11.4 H13.3 Q1.1 Q2.2 R3.1 R4.1 R14.1 R15.1 S1.2 S2.2 TP8.1 U1.2 U1.17 U1.46 U1.60 U2.7 U2.EPAD U3.2 U4.2 U5.2 U6.3 U6.6 U6.13 U6.17 U7.2 | length 149.3
  Top Side w0.3: v1(1.45,33.725) 1.525,33.8 3.077,33.8 C6.1 ; v1(2.575,32.025) 2.575,32.214 3.085,32.724 C6.1 ; U3.2 3.085,35.774 C6.1 ; v1(3.825,41.9) 3.725,41.9 3.525,41.7 C8.1 C7.1 5.6,41.875 v1(5.575,41.9) ; C12.1@4.25,64.275 5.3,64.275 5.65,63.925 C19.1 6.65,62.864 6.25,62.464 v1(6.25,62.275) ; U7.2 6.274,26.943 6.467,26.75 C30.2 ; v1@6.3,62.25 6.3,62.225 8.7,59.825 GND1.1 ; C29.2@8.625,30.15 8.625,28.475 8.75,28.475 v1(8.875,28.35) C30.2 ; C29.2@8.85,29.9 C29.2@8.875,29.875 ; v1(10.225,26.975) 10.036,26.975 9.786,26.725 8.9,26.725 C30.2 ; v1(14.3,26.3) 14.375,26.225 D1.1 ; D1.1@14.525,24.9 16.6,24.9 U2.7@16.65,24.85 ; C9.1 C9.1@15.675,32.676 ; U2.7 18.39,24.865 U2.EPAD@19,25.475 ; U4.2@17.135,32.539 U4.2 ; C11.1 22.686,31.95 23.036,31.6 v1(23.225,31.6) ; C11.1@21.575,31.925 21.4,31.75 C10.1 23.175,29.925 v1(23.2,29.9) ; v1(22.775,65.6) 23.014,65.6 23.264,65.35 24.325,65.35 C15.2 25.175,64.65 25.175,63.95 25.369,63.756 U1.17@25.85,63.756 ; C3.1 25.825,26.275 v1(27.7,26.275) ; Q1.1@27.65,22.975 28.875,22.975 29.2,23.3 R4.1 29.2,25.475 29.425,25.7 v1(29.425,25.95) ; R3.1 30.575,74.5 v1@30.625,74.55 ; C22.2 v1(34.25,68.725) ; U1.46 34.75,53.3 35.225,52.825 C17.2 35.175,52.05 35.175,51.214 35.575,50.814 v1(35.575,50.625) ; U1.2 35.25,66.56 34.25,67.56 v1(34.25,68.725) ; v1(35.6,62.9) 36.75,61.75 U1.60@37.475,61.75 ; C13.2 34.275,68.75 v1(34.25,68.725) ; C24.2 v1(37.675,74.775) 37.675,74.825 38.125,75.275 R14.1 ; v1(38.025,17.525) C28.2 40.85,17.525 41.125,17.8 U6.17@43.25,17.8 ; v1(41.2,24.325) 41.3,24.225 C27.1 42.875,25.875 v1(42.85,25.9) ; U6.3 42.3,16.825 v4(43.275,17.8) ; C4.2 44.15,67.375 v1(44.175,67.35) 45.25,67.35 46.25,66.35 TP8.1 ; U6.13 42.95,18.125 v4(43.275,17.8) ; C5.2 44.2,63.15 v1(46.125,63.15) 46.15,63.175 TP8.1@46.15,65.525 ; U6.6 44.25,16.825 v4(43.275,17.8) ; S1.2 v1(53.65,49.125) ; S2.2 v1(53.625,54.075) ; Q2.2 52.175,28.775 v1(53.25,27.7) ; R15.1 57.45,60.3 v1(58.35,61.2) ; H9.5 59.25,70.3 H9.6@59.25,70.325 ; H9.6@61.95,64.325 H9.6@61.95,66.8 ; H9.6@61.95,68.8 H9.6@61.95,71.3
  Top Side w0.6: v1(2.65,8.225) 2.671,8.246 C2.1 2.671,13.296 v1(2.675,13.3) ; U5.2@4.075,66.825 4.179,66.721 4.179,64.996 4.2,64.975 C12.1 4.225,64.25 4.225,62.75 v1(4.25,62.725) ; v1@14.261,32.856 C9.1 v1(15.494,34.163) ; C9.1@15.675,32.676 16.194,32.676 16.481,32.389 U4.2 ; v1(53.25,27.7) 53.358,27.7 53.558,27.5 54.75,27.5 C25.1 v1(54.85,28.925)
  Bottom Side w0.3: C16.1 29.85,60.925 30.525,60.25 v1(30.55,60.25) 29.85,59.55 C18.1 29.85,58.025 v1(31,56.875) 32.625,58.5 C21.1 32.475,58.875 31.95,58.875 30.588,60.238 30.588,60.288 31.325,61.025 31.9,61.025 32.225,60.7 C14.1 ; C20.2 34.791,62.766 35.466,62.766 v1(35.6,62.9)
  other v1: 14.046,33.071 30.625,74.525
  other v2: 29.625,4.925 9.3,5.7 56.45,9.7 38.15,26.125 26.5,37.525 45.7,44 5.8,51.725 60.525,58.1 47.85,72.25 33.7,82
  other v3: 19,25.5
IRQ: U1.15 U5.8 | length 21.7
  Top Side w0.3: U5.8 16.375,66.8 18.8,64.375 v1(18.9,64.375) ; v1(20.3,65.9) 20.3,66.025 22.4,68.125 27.607,68.125 28.75,66.982 U1.15
  Bottom Side w0.3: v1(18.9,64.375) 18.9,64.438 20.3,65.838 v1(20.3,65.9)
LED: TP24.1 U1.30 U7.3 | length 41.9
  Top Side w0.3: TP24.1@2.925,27.875 3.057,27.743 U7.3 v1(5.325,29.825) v1(5.325,29.825) ; v1(24.5,57.25) U1.30@26.45,57.25
  Bottom Side w0.3: v1(5.325,29.825) 5.325,31.325 24.5,50.5 v1(24.5,57.25)
MISO: U1.27 U5.7 | length 19.8
  Top Side w0.381: U5.7 10.645,66.541 10.645,65.041 11.811,63.875 v1(14.675,63.875) ; v1(21.425,58.65) 21.494,58.719 U1.27@25.89,58.719
  Bottom Side w0.381: v1(14.675,63.875) 16.2,63.875 v1(21.425,58.65)
MOSI: U1.22 U5.6 | length 20.9
  Top Side w0.3: U5.6 9.114,65.3 11.539,62.875 v1(12.6,62.875) ; v1(14.025,60.65) 15.85,60.65 16.502,61.303 22.766,61.303 22.819,61.25 U1.22@25.85,61.25
  Bottom Side w0.3: v1(12.6,62.875) 12.6,62.075 v1(14.025,60.65)
NetC1_1: C1.1 D1.3 L1.1 TP2.1 U2.8 | length 11.3
  Top Side w0.3: TP2.1 16.689,21.325 C1.1@16.7,21.325 ; D1.3@14.025,23.6 U2.8@16.725,23.6
  Top Side w0.6: L1.1@16.675,17.675 16.7,17.7 C1.1 ; C1.1@16.689,21.325 U2.8
NetC1_2: C1.2 U2.1 | length 4.5
  Top Side w0.3: C1.2@18.125,21.3 19.6,21.3 21.25,22.95 21.25,23.534 U2.1
NetC3_2: C3.2 Q1.2 R2.2 TP1.1 U2.2 U2.3 | length 11
  Top Side w0.3: U2.2 U2.3 U2.3 U2.3@21.325,26.15 ; TP1.1 25.825,22.875 Q1.2@25.825,22.975
  Top Side w0.6: U2.2@21.951,24.85 R2.2 ; R2.2@24.05,24.875 24.075,24.85 C3.2 ; Q1.2 C3.2@25.8,24.825
NetC4_1: C4.1 U1.62 Y1.3 | length 7.4
  Top Side w0.3: U1.62 37.55,62.775 38.589,62.775 39.875,64.061 39.875,65.7 Y1.3@39.9,65.725 ; Y1.3@39.9,65.6 Y1.3 39.925,66.95 40.35,67.375 C4.1@41.175,67.375
NetC5_1: C5.1 U1.61 Y1.1 | length 7.7
  Top Side w0.3: U1.61@37.575,62.25 38.7,62.25 39.2,62.75 40.825,62.75 42.325,61.25 Y1.1 ; Y1.1@42.3,61.25 Y1.1 ; C5.1 42.85,60.7 Y1.1
NetC7_2: C7.2 U3.4 | length 1.8
  Top Side w0.3: U3.4@3.95,38.475 3.95,38.502 4.173,38.725 C7.2
NetC10_2: C10.2 U4.4 | length 1.5
  Top Side w0.3: U4.4@19.975,31.425 20,31.4 C10.2
NetC12_2: C12.2 R9.1 TP14.1 U5.1 | length 8.4
  Top Side w0.3: R9.1 3.875,61.325 3.875,60.725 4.6,60 TP14.1@5.35,60
  Top Side w0.6: U5.1@2.775,66.85 2.8,66.825 C12.2@2.8,64.3 ; R9.1 C12.2@2.8,64.3 ; C12.2 C12.2@2.8,64.3
NetC14_2: C14.2 C16.2 C18.2 C21.2 L3.2 U1.8 U1.12 U1.24 U1.54 | length 31.2
  Top Side w0.3: U1.24 27.087,60.25 27.1,60.263 28.413,60.263 28.425,60.25 v1(28.45,60.275) ; v1(30.25,63.625) U1.12 30.25,67.975 29.8,68.425 29.8,69.8 31.475,71.475 L3.2 ; U1.8 32.25,63.85 32.275,63.825 v1(32.275,63.625) ; v1(35.675,58.75) U1.54
  Bottom Side w0.3: C18.2 28.45,60.3 C16.2 28.45,62.825 29.25,63.625 v1(30.25,63.625) 32.25,63.625 32.275,63.65 v1(32.275,63.625) C14.2@32.275,62.125 ; C14.2@32.25,62.15 C14.2@32.275,62.125 ; v1@35.7,58.725 C21.2 34.025,58.75 33.025,59.75 33.025,61.375 C14.2@32.275,62.125
NetC23_1: C23.1 R14.2 | length 2.4
  Top Side w0.3: C23.1 R14.2@39.425,72.625
NetC23_2: C23.2 C24.1 L3.1 U1.64 | length 11.3
  Top Side w0.3: L3.1 36.525,71.475 C24.1 37.75,70.325 C23.2 39.425,67.55 38.9,67.025 38.9,64.1 38.55,63.75 U1.64
NetC26_2: C26.2 U6.11 | length 2.4
  Top Side w0.3: U6.11@44.25,20.575 44.25,21.75 44.65,22.15 44.65,22.65 C26.2
NetC28_1: C28.1 U6.14 | length 3.6
  Top Side w0.3: C28.1@39.725,18.925 41.275,18.925 42.3,19.95 U6.14
NetDL1_1: DL1.1 R16.1 | length 1.6
  Top Side w0.3: DL1.1 R16.1@29.975,49.075
NetDL2_1: DL2.1 R19.1 | length 1.6
  Top Side w0.3: DL2.1 R19.1@31.475,49.075
NetF1_1: F1.1 H2.2 | length 2.6
  Top Side w0.6: H2.2@29.375,14.025 29.2,14.2 F1.1 F1.1@29.4,16.025
NetH5_1: H5.1 R7.2 | length 6.3
  Top Side w0.381: R7.2 19.55,56.725 18.525,55.7 18.525,53.125 H5.1@19.6,52.05
NetH6_1: H6.1 R8.2 | length 15
  Top Side w0.381: R8.2 18.225,56.75 17.85,56.375 17.85,45.125 19.55,43.425 H6.1@19.65,43.425
NetH7_1: H7.1 R10.2 | length 16
  Top Side w0.381: H7.1@14.375,42.775 14.425,42.775 H7.1 17.225,45.575 17.225,56.375 16.9,56.7 R10.2
NetH8_1: H8.1 R11.2 | length 6.2
  Top Side w0.381: H8.1@14.475,51.725 14.49,51.725 15.1,52.335 15.1,52.35 15.575,52.825 R11.2
NetH11_1: H11.1 Q2.3 R13.1 | length 7.6
  Top Side w0.3: R13.1 54.175,31.15 54.21,31.115 H11.1
NetH12_1: H12.1 U6.2 | length 10.9
  Top Side w0.381: H12.1@38.325,5.475 38.325,5.525 H12.1 41.65,8.85 U6.2
NetH12_2: H12.2 U6.4 | length 10.3
  Top Side w0.381: H12.2@40.875,5.525 40.875,5.535 H12.2 42.95,7.61 U6.4
NetH13_2: H13.2 TP21.1 U7.4 | length 8.2
  Top Side w0.3: TP21.1@2.85,25.425 2.932,25.343 U7.4 5.324,19.699 H13.2@5.3,19.675
NetH14_1: H14.1 U6.7 | length 12.1
  Top Side w0.4: U6.7 44.9,13.8 44.325,13.225 44.325,8.075 47.425,4.975 47.765,4.975 H14.1 H14.1@47.9,5.075
NetH14_2: H14.2 U6.5 | length 10.5
  Top Side w0.4: U6.5 43.6,7.875 45.3,6.175 H14.2@45.3,5.175
NetL2_1: L2.1 R9.2 | length 1.5
  Top Side w0.6: L2.1 2.8,60.875 R9.2@2.825,60.9
NetR2_1: R2.1 U2.4 | length 3.2
  Top Side w0.3: U2.4@21.325,27.425 23.025,27.425 R2.1
NetR5_2: R5.2 U1.57 | length 20.1
  Top Side w0.3: U1.57 38.826,60.25 39.301,59.775 44.775,59.775 53.625,68.625 R5.2@53.775,68.625
NetR6_2: R6.2 U1.56 | length 19.5
  Top Side w0.3: U1.56 37.55,59.775 38.664,59.775 39.114,59.325 44.961,59.325 52.261,66.625 R6.2@53.8,66.625
NetR17_2: R17.2 S1.1 | length 3.6
  Top Side w0.3: R17.2 44.05,49.95 44.875,49.125 S1.1
NetR18_2: R18.2 S2.1 | length 3.6
  Top Side w0.3: R18.2 44.025,55.775 44.025,55.025 44.975,54.075 S2.1@46.425,54.075
NetTP7_1: TP7.1 U1.55 | length 10.4
  Top Side w0.3: U1.55 38.553,59.25 39.028,58.775 TP7.1
nFault: U1.37 U6.8 | length 52.5
  Top Side w0.3: U1.37 30.25,52.786 26.725,49.261 26.725,44.664 39.064,32.325 42.175,32.325 47.775,26.725 47.775,17.85 45.55,15.625 U6.8 ; U6.8@45.525,15 U6.8@45.525,15.1
nRST: H10.1 R17.1 TP5.1 U1.39 | length 34.1
  Top Side w0.3: U1.39 31.25,55.5 32.95,57.2 35.225,57.2 36.6,55.825 36.606,55.825 41.631,50.8 42.45,50.8 R17.1@42.525,50.875 ; R17.1@42.575,50.825 R17.1@42.562,50.838 ; TP5.1@43.25,48.175 43.25,49.375 42.525,50.1 R17.1@42.525,50.875 ; H10.1@57.385,51.65 43.375,51.65 R17.1@42.562,50.838 ; H10.1 57.41,51.625 57.475,51.625 H10.1@57.5,51.6 ; R17.1@42.525,50.875 R17.1@42.562,50.838
nSleep: U1.36 U6.1 | length 53.4
  Top Side w0.3: U1.36 29.75,52.923 26.275,49.448 26.275,44.477 35.975,34.777 35.975,24.35 v1(36.025,24.3) ; v1(36.05,20.975) 36.05,14.9 38.5,12.45 40.375,12.45 41.025,13.1 U6.1@41.025,15.175
  Bottom Side w0.3: v1(36.025,24.3) 36.037,24.288 36.037,20.988 v1(36.05,20.975)
PA18: H4.3 U1.10 | length 24.1
  Top Side w0.3: U1.10 v1(31.25,67.225)
  Bottom Side w0.3: v1(31.25,67.225) 31.306,67.281 38.97,67.281 42.325,70.636 H4.3@42.325,80.55
PA19: H4.2 U1.13 | length 20
  Top Side w0.3: v1(28.75,68.75) 29.75,67.75 U1.13
  Bottom Side w0.3: v1(28.75,68.75) 28.884,68.884 28.884,69.674 39.75,80.54 H4.2@39.75,80.575
PA20: H4.1 U1.16 | length 20.1
  Top Side w0.3: v1(27.1,67.275) 27.125,67.3 27.75,67.3 28.25,66.8 U1.16
  Bottom Side w0.3: v1(27.1,67.275) 27.125,67.3 27.125,68.625 37.275,78.775 H4.1@37.275,80.55
PB2: H4.4 U1.5 | length 23.9
  Top Side w0.3: U1.5 33.75,64.375 34.05,64.075 36.4,64.075 v1(37.6,65.275)
  Bottom Side w0.3: v1(37.6,65.275) 42.85,70.525 42.85,78.61 44.765,80.525 H4.4@44.875,80.525
PWM_H0: U1.32 U6.16 | length 46.7
  Top Side w0.3: U1.32@26.425,56.25 28.925,56.25 v1(29.15,56.475) ; v1(38.6,20.625) 38.625,20.6 U6.16
  Bottom Side w0.3: v1(29.15,56.475) 29.15,52.4 40.7,40.85 40.7,29.4 39.075,27.775 39.075,21.1 v1(38.6,20.625)
PWM_H1: U1.44 U6.15 | length 41.5
  Top Side w0.3: U1.44 33.725,54.45 33.725,53.399 32.375,52.049 32.375,49.825 33.675,48.525 v1(34.375,48.525) ; v1(39.875,21.75) 39.875,21.825 40.175,22.125 41.325,22.125 41.65,21.8 U6.15
  Bottom Side w0.3: v1(34.375,48.525) 34.375,47.975 41.2,41.15 41.2,29.05 39.55,27.4 39.55,22.075 v1(39.875,21.75)
PWM_H2: U1.48 U6.9 | length 43.9
  Top Side w0.3: U1.48 v1(36.825,54.475) ; U6.9 45.55,19.15 45.891,18.809 46.666,18.809 v1(46.8,18.675)
  Bottom Side w0.3: v1(36.825,54.475) 37.925,53.375 37.925,45.75 42.175,41.5 42.175,29.35 44.4,27.125 44.4,21.075 v1(46.8,18.675)
PWM_H3: U1.47 U6.10 | length 45.3
  Top Side w0.3: U1.47 35.275,54.45 35.275,53.411 36.85,51.836 v1(36.85,51.825) ; U6.10 44.9,18.75 45.975,17.675 v1(45.975,17.325)
  Bottom Side w0.3: v1(36.85,51.825) 37.475,51.2 37.475,45.511 41.65,41.336 41.65,29.1 43.95,26.8 43.95,20.6 45.975,18.575 v1(45.975,17.325)
RF_CE: U1.20 U5.3 | length 25.5
  Top Side w0.3: U5.3 5.3,68.375 5.575,68.65 16,68.65 22.4,62.25 U1.20
SP_EN: Q2.1 TP18.1 U1.38 | length 44.5
  Top Side w0.3: U1.38 30.75,52.65 27.175,49.075 27.175,44.85 39.25,32.775 51.425,32.775 Q2.1 52.15,32 52.15,31.4 51.425,30.675 TP18.1
SPCK: U1.21 U5.5 | length 21.3
  Top Side w0.3: U5.5@7.875,66.775 7.875,65.875 12,61.75 15.875,61.75 ; 15.823,61.753 22.953,61.753 22.955,61.75 U1.21
STATUS0: R16.2 U1.41 | length 4.8
  Top Side w0.3: R16.2@30,50.6 30,51.19 32.25,53.44 U1.41
STATUS1: R19.2 U1.42 | length 4.4
  Top Side w0.3: R19.2@31.475,50.575 31.5,50.6 31.5,51.95 32.75,53.2 U1.42
SWCLK: H10.2 U1.53 | length 25.9
  Top Side w0.3: U1.53 40.075,58.25 41.775,56.55 44.524,56.55 56.275,56.55 60,52.825 H10.2@60,51.625
SWDIO: H10.4 U1.51 | length 31.2
  Top Side w0.3: U1.51@37.525,57.25 39.525,57.25 40.225,56.55 v1(40.225,55.975) ; v1(42.05,57.675) 42.65,57.075 56.45,57.075 61.225,52.3 61.225,50.475 60.025,49.275 H10.4@60.025,49.05
  Bottom Side w0.3: v1(40.225,55.975) 40.288,55.975 41.988,57.675 v1(42.05,57.675)
USB_DETECT: R12.1 R15.2 U1.43 | length 28.5
  Top Side w0.3: U1.43 33.25,55.514 33.65,55.914 v1(33.65,56.3) ; v1(54.725,61.25) 55.7,61.25 56.475,62.025 R12.1
  Bottom Side w0.3: v1(33.65,56.3) 38.95,56.3 43.9,61.25 v1(54.725,61.25)
VBAT: C26.1 C27.2 F1.2 Q1.3 R1.2 TP20.1 U6.12 | length 29.7
  Top Side w0.3: C27.2@42.925,22.85 43,22.85 44.375,24.225 44.725,24.225 C26.1 44.775,26.8 TP20.1@44.75,26.825
  Top Side w0.6: Q1.3@26.75,20.875 26.8,20.925 R1.2 ; v1(26.8,19.1) 26.825,19.125 F1.2 29.2,20.975 R1.2@29.175,21 ; F1.2@29.175,19.1 31.325,19.1 35.05,22.825 C27.2 42.925,22.825 43.6,22.15 U6.12
VBUS: H9.1 R12.2 TP17.1 | length 6.2
  Top Side w0.3: TP17.1 54.45,63.6 55.725,64.875 56.45,64.875 R12.2@56.55,64.975 ; R12.2 56.65,64.875 58.25,66.475 H9.1@59.225,66.475 ; H9.1@59.25,66.475 H9.1@59.275,66.5
pads on no net: D1.2 H9.4 H10.3 H10.9 H10.10 U1.3 U1.4 U1.6 U1.9 U1.11 U1.19 U1.28 U1.29 U1.31 U1.33 U1.40 U1.49 U1.50 U1.59 U1.63 U2.6 Y1.2 Y1.4

## Polygon pours and split planes (outlines as drawn)
GND on Top Side "Top Side - GND" (solid, pour order 2): 0,85 64,85 64,0 0,0 0,85
GND on Bottom Side "Bottom Side GND" (solid, pour order 3): 0,85 64,85 64,0 0,0 0,85
GND on Ground Plane (split plane): 63.49,0.51 0.51,0.51 0.51,84.49 63.49,84.49